# Altium PCB screen_board.PcbDoc
Units mm, origin at the board's own origin, x right, y up, seen from the top; angles counter-clockwise.
Board outline 88.5 x 66.5 mm, 2 copper layers (Top Layer, Bottom Layer), stack 1.535 mm thick; 70 components, 31 nets, 202 pads, 66 vias.
Unrouted connection lines stored in the file: 1.
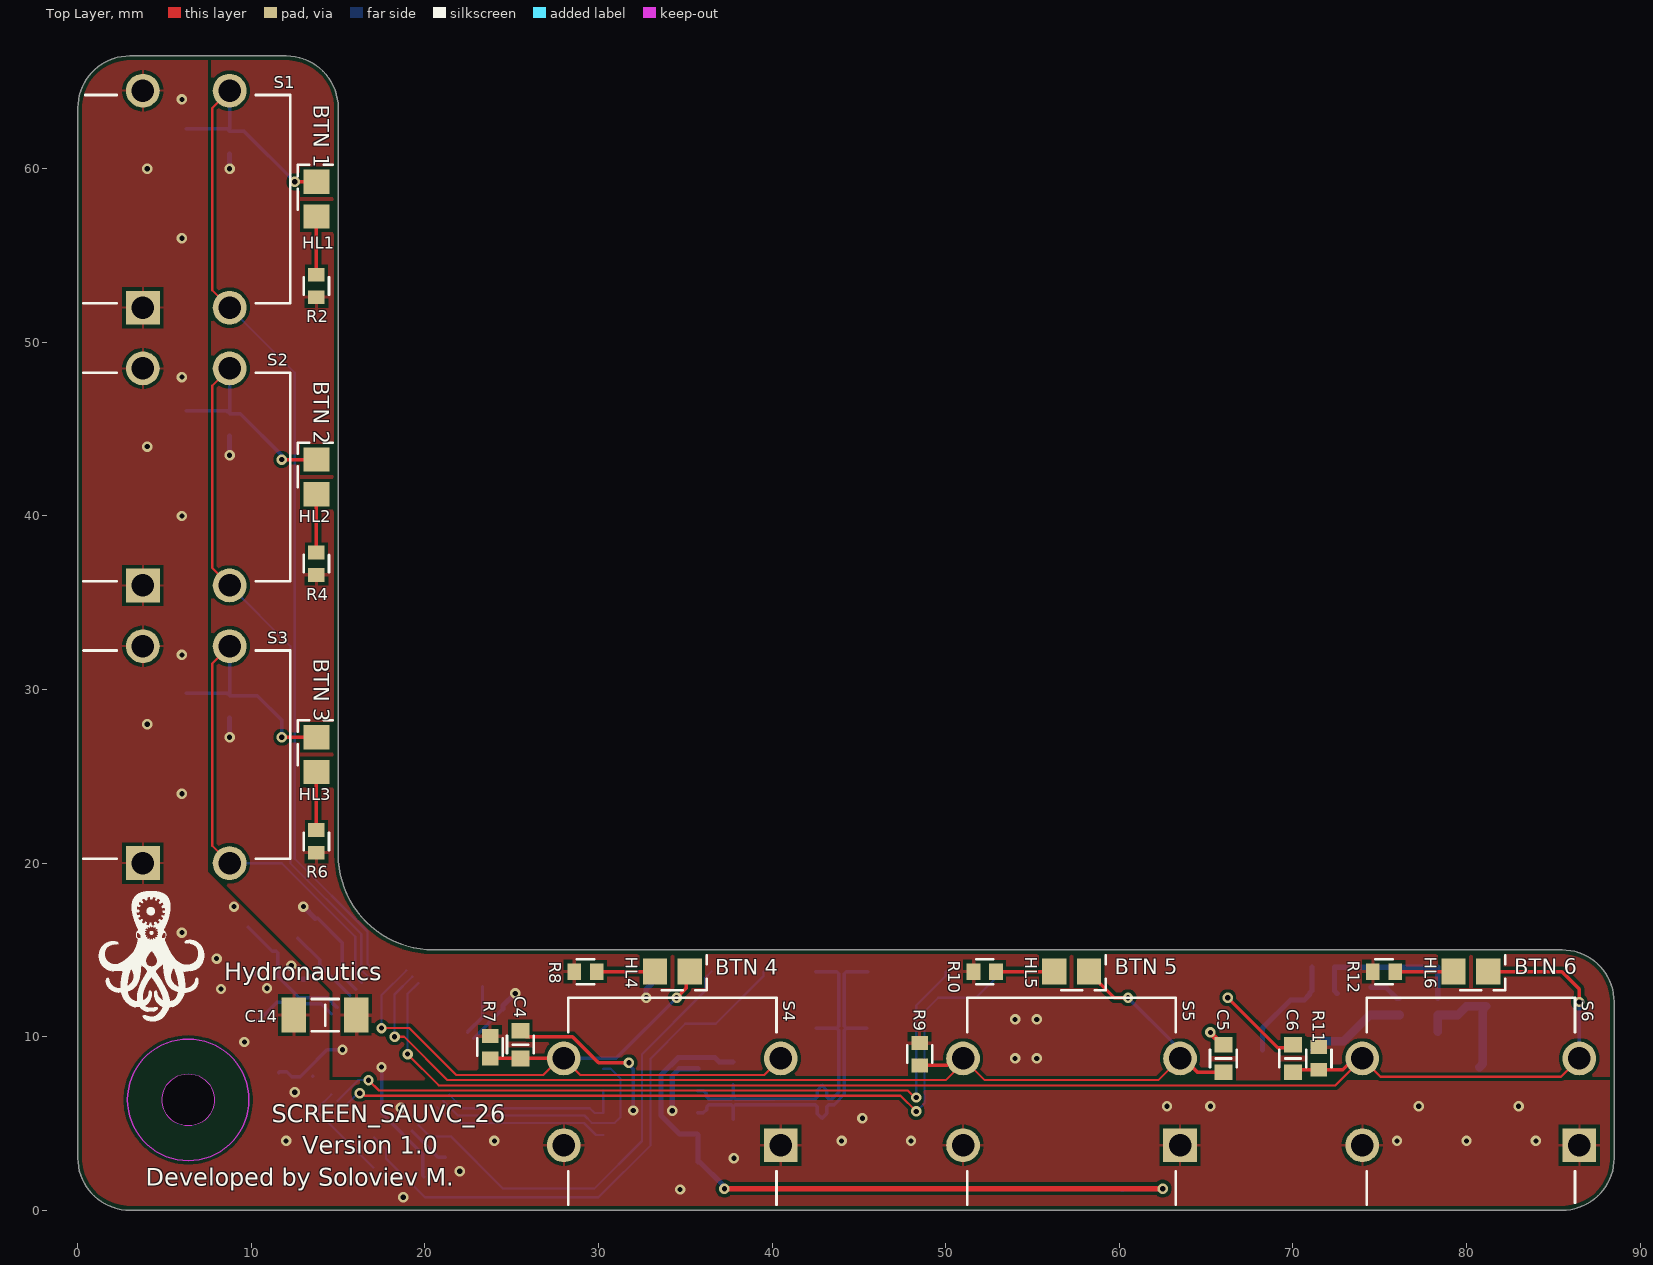
[diagram p0: Top Layer view]
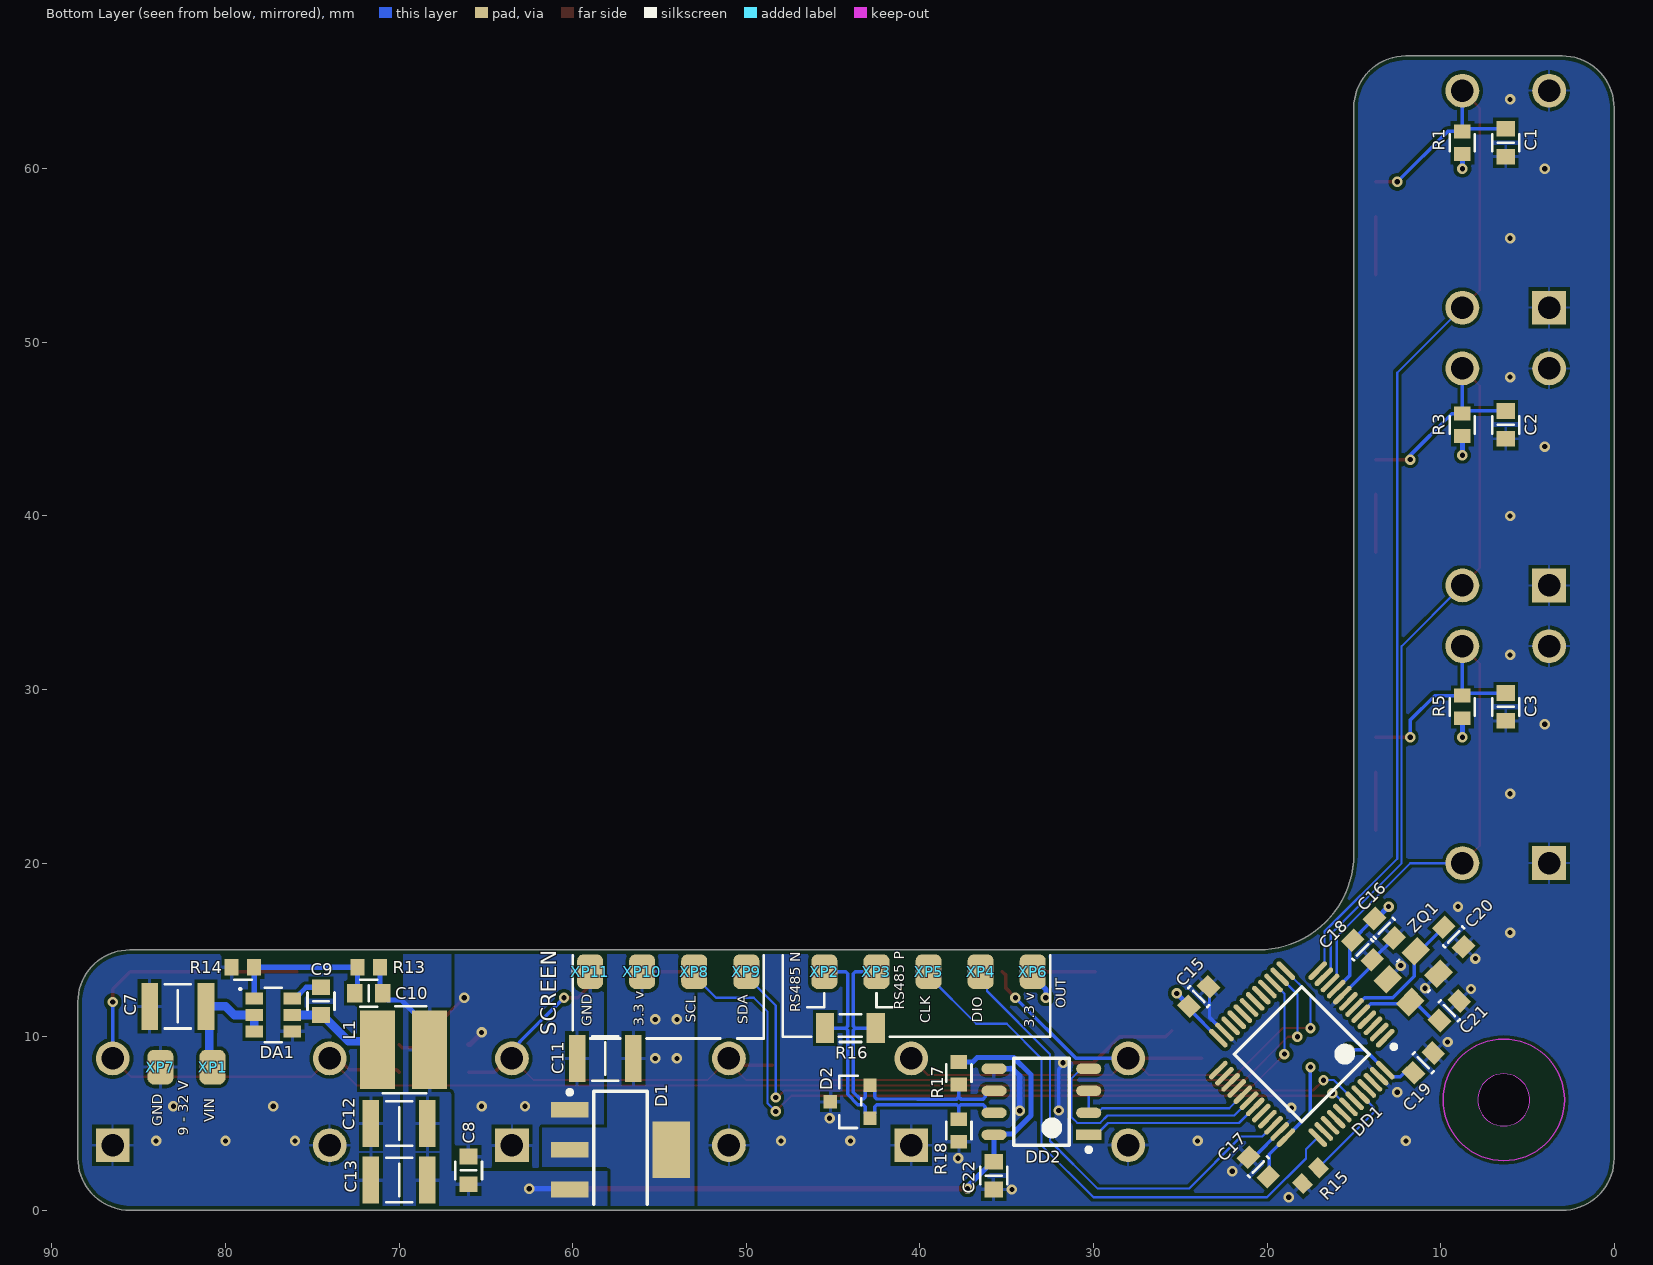
[diagram p1: Bottom Layer view, seen from below]
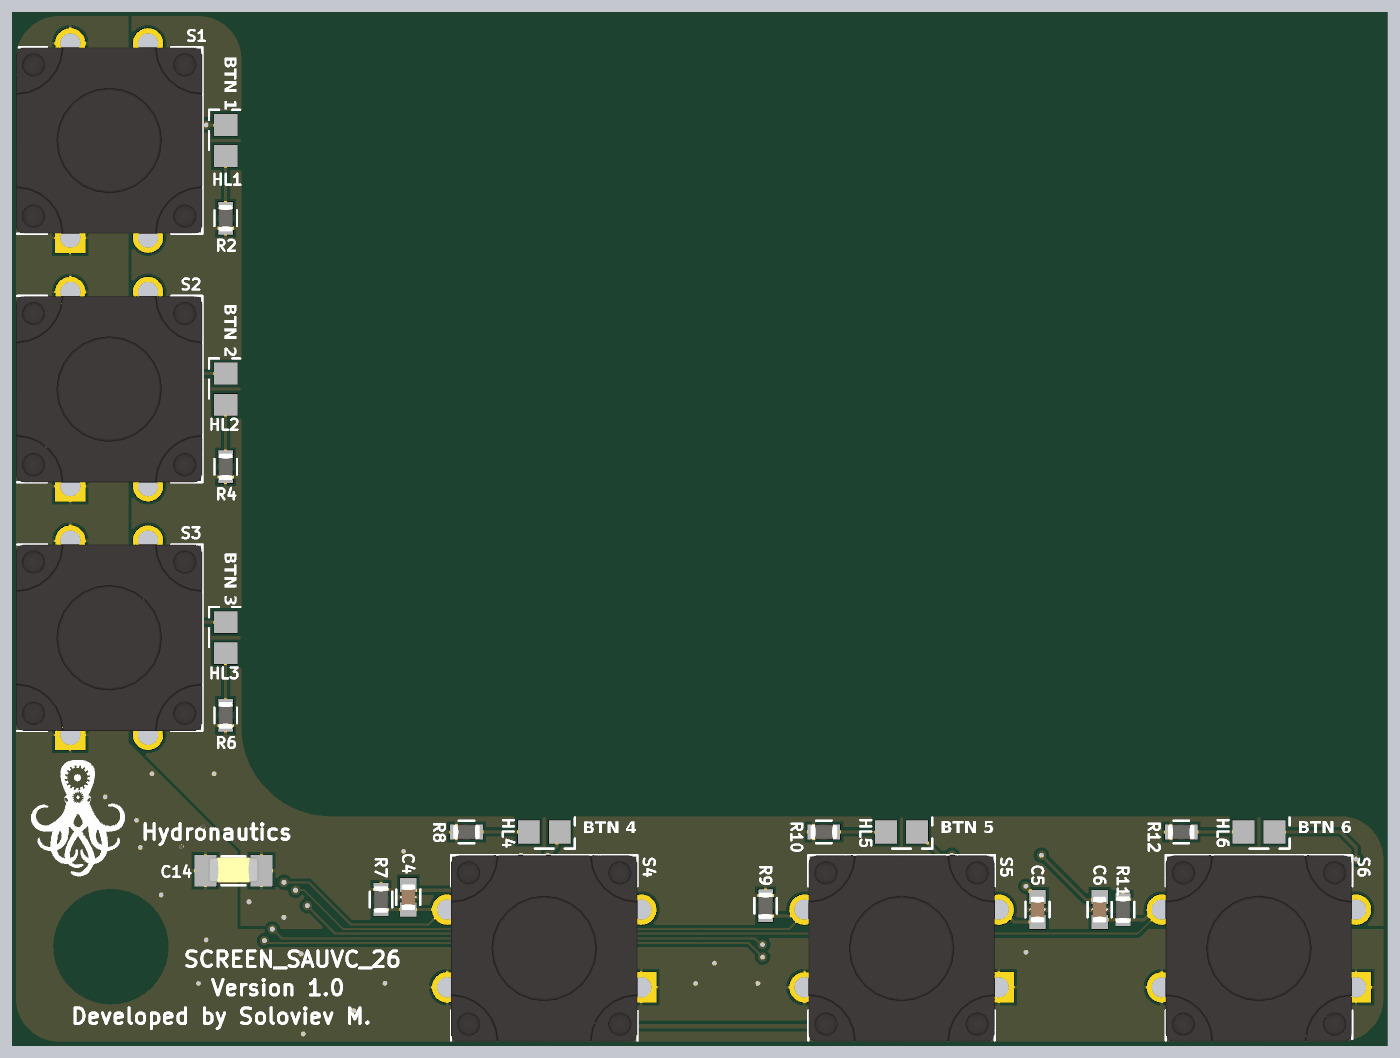
[diagram p2: 3D render of the assembled board from above, using the file's embedded part models]
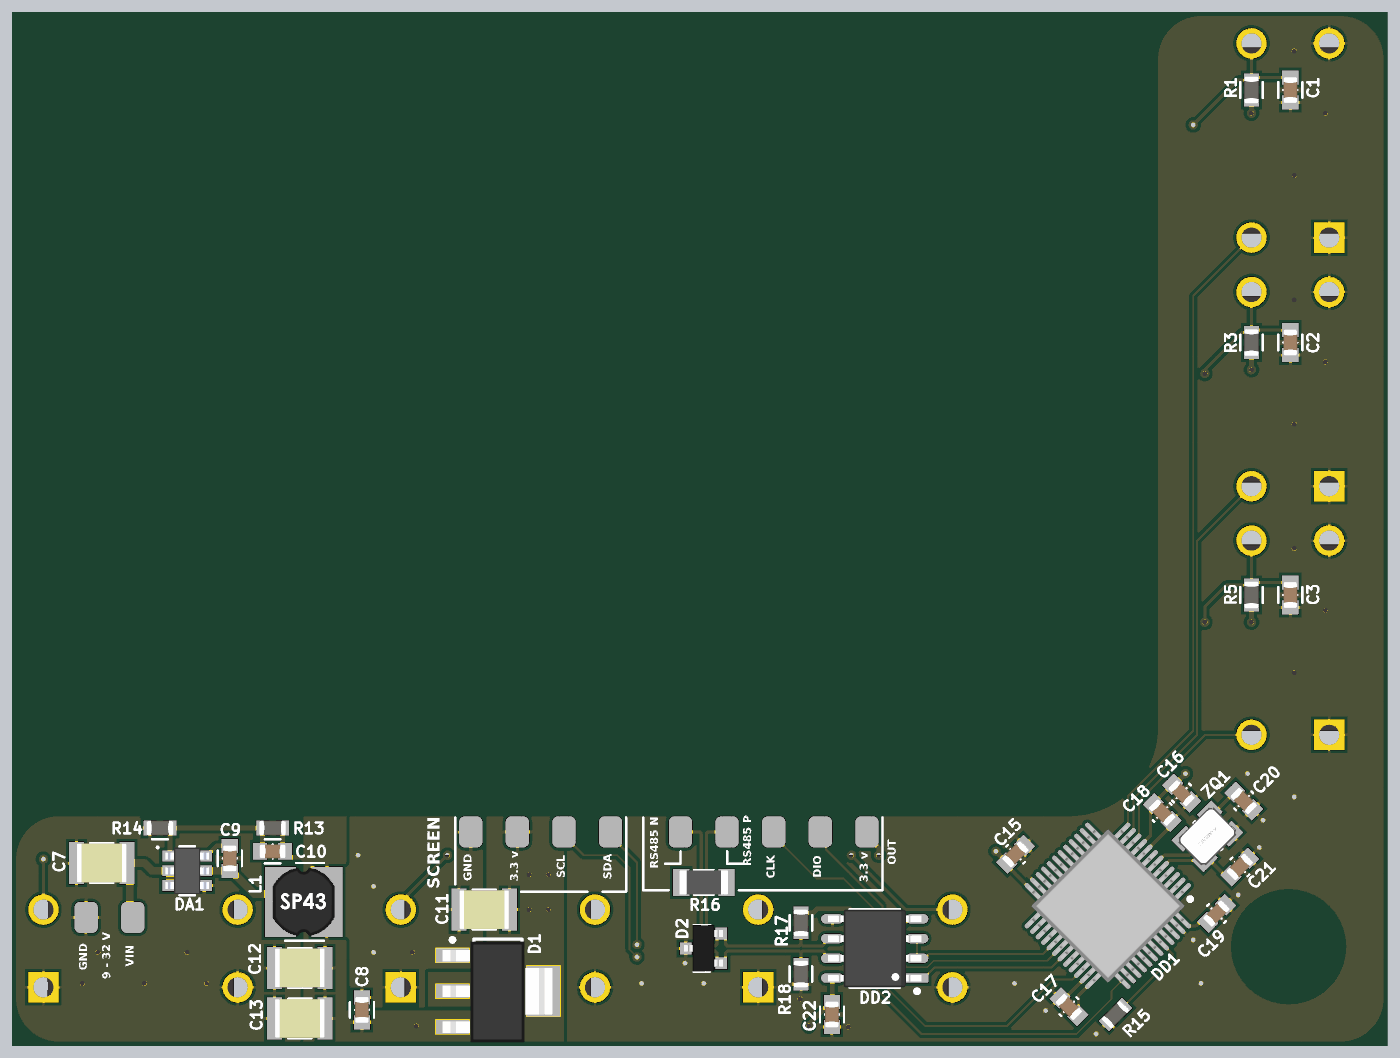
[diagram p3: 3D render of the assembled board from below, using the file's embedded part models]

## Layer stack, top to bottom
Top Solder: solder mask 0.0102, Solder Resist, Dk 3.5
Top Layer: signal copper 0.0175
Dielectric 1: core 1.5, FR4, Dk 4.6
Bottom Layer: signal copper 0.0175
Bottom Solder: solder mask 0.0102, Solder Resist, Dk 3.5

## Board outline
0.006,3.006 0.006,63.506 cw(c3.006,63.506) 3.006,66.506 12.006,66.506 cw(c12.006,63.506) 15.006,63.506 15.006,20.506 ccw(c20.506,20.506) 20.506,15.006 85.506,15.006 cw(c85.506,12.006) 88.506,12.006 88.506,3.006 cw(c85.506,3.006) 85.506,0.006 3.006,0.006 cw(c3.006,3.006)
cut-out: 6.364,4.864 cw(c6.364,6.364) 6.364,7.864 cw(c6.364,6.364)

## Design rules (kind name [scope] priority, off if disabled: settings)
AcuteAngle [All] p1: minimum=3.50000000000000E+0001 checktracksonly=FALSE
BoardOutlineClearance "BoardOutlineClearance 1" [All] p1: gap=0.25 ignorepadtopadclearanceinfootprint=FALSE except(0: Arc-SplitContinuation Track-SplitContinuation SMDPad-SplitContinuation THPad-SplitContinuation Via-SplitContinuation Fill-SplitContinuation Poly-SplitContinuation Region-SplitContinuation Text-SplitContinuation) // Milling
BoardOutlineClearance "BoardOutlineClearance 2" [All] p2: gap=0.4 ignorepadtopadclearanceinfootprint=FALSE except(0: Arc-SplitContinuation Track-SplitContinuation SMDPad-SplitContinuation THPad-SplitContinuation Via-SplitContinuation Fill-SplitContinuation Poly-SplitContinuation Region-SplitContinuation Text-SplitContinuation) // V-Cut
Clearance "Clearance-1 1/2 Oz" [All] p1: gap=0.125 ignorepadtopadclearanceinfootprint=FALSE except(0.2: Arc-Fill Arc-Poly Track-Fill Track-Poly SMDPad-SMDPad SMDPad-Fill SMDPad-Poly THPad-Fill THPad-Poly Via-Fill Via-Poly Fill-Fill Fill-Poly Poly-Poly Poly-Region Poly-Text; 0.25: Arc-Hole Track-Hole SMDPad-Hole THPad-Hole Via-Hole Fill-Hole Poly-Hole Region-Hole Text-Hole) // Standart
DiffPairsRouting "DiffPairsRouting 1/2 Oz" [All] p1: maxlimit=0.125 minlimit=0.125 mostfreqgap=0.125 toplayer_minwidth=0.2 toplayer_maxwidth=0.2 toplayer_prefwidth=0.2 bottomlayer_minwidth=0.2 bottomlayer_maxwidth=0.2 bottomlayer_prefwidth=0.2 maxuncoupledlength=12.7
HoleSize "Minimum HoleSize" [IsPad] p1: absolutevalues=TRUE maxlimit=5.9 minlimit=0.6 maxpercent=80.000 minpercent=20.000
HoleSize "Minimum HoleSize VIA 1" [IsVia] p2: absolutevalues=TRUE maxlimit=5.9 minlimit=0.3 maxpercent=80.000 minpercent=20.000 // Standart
HoleToHoleClearance Hole2HoleClearance [All] p1: gap=0.25 allowstackedmicrovias=FALSE
MinimumAnnularRing "Minimum AR VIA Standart" [IsVia] p1: minimumring=0.15
MinimumAnnularRing "Minimum AR PAD Standart" [IsPAD] p2: minimumring=0.2
MinimumSolderMaskSliver "SolderMask Bridge Standart" [All] p1: minsoldermaskwidth=0.149 // All Masks
PlaneClearance "PlaneClearance-1 1/2 Oz" [All] p1: clearance=0.2 // Standart
PlaneConnect "TermalConnect-1 1/2 Oz" [All] p1: pad.planeconnectstyle=Relief pad.reliefexpansion=0.2 pad.reliefentries=4 pad.reliefconductorwidth=0.2 pad.reliefairgap=0.2 via.planeconnectstyle=Direct via.reliefexpansion=0.2 via.reliefentries=4 via.reliefconductorwidth=0.2 via.reliefairgap=0.2 // Standart
PolygonConnect [HasFootprint('SOT223')] p1: connectstyle=Direct reliefconductorwidth=0.254 reliefentries=4 polygonreliefangle="90 Angle" airgapwidth=0.254
PolygonConnect "PolygonConnect-1 1/2 Oz" [All] p2: thpad.connectstyle=Relief thpad.reliefconductorwidth=0.15 thpad.reliefentries=4 thpad.polygonreliefangle="90 Angle" thpad.airgapwidth=0.2 smdpad.connectstyle=Relief smdpad.reliefconductorwidth=0.2 smdpad.reliefentries=4 smdpad.polygonreliefangle="90 Angle" smdpad.airgapwidth=0.2 via.connectstyle=Direct via.reliefconductorwidth=0.254 via.reliefentries=4 via.polygonreliefangle="90 Angle" via.airgapwidth=0.254 // Standart
RoutingCorners [All] p1 off: cornerstyle=45-Degree minsetback=2.54 maxsetback=2.54
RoutingVias [All] p1: holewidth=0.3 width=0.6 viastyle="Through Hole" minholewidth=0.3 minwidth=0.6 maxholewidth=0.3 maxwidth=0.6
SilkToSilkClearance Silk2SilkClearance [All] p1 off: silktosilkclearance=0.15
SilkToSolderMaskClearance Silk2SolderMaskClearance [IsPad] p1 off: minsilkscreentomaskgap=0.15 clearancetoexposedcopper=TRUE
SolderMaskExpansion [IsVia] p1: expansion=0.102 istentingtop=TRUE
SolderMaskExpansion "SolderMaskExpansion LDI" [All] p2: expansion=0.05 istentingtop=FALSE // Advance
UnRoutedNet [All] p1: checkbadconnections=TRUE
Width "Width 1/2 Oz" [All] p1: maxlimit=0.5 minlimit=0.125 preferedwidth=0.2 checkconnectedcopper=TRUE
20 further rules are at their usual default settings.

## Classes and differential pairs
component class RS485: C22 D2 DD2 R16 R17 R18
net class BUTTON[1..6]: BUTTON1 BUTTON2 BUTTON3 BUTTON4 BUTTON5 BUTTON6
component class Power: C7 C8 C9 C10 C11 C12 C13 D1 DA1 L1 R13 R14
component class connectors: XP1 XP2 XP3 XP4 XP5 XP6 XP7 XP8 XP9 XP10 XP11
component class buttons_and_leds: C1 C2 C3 C4 C5 C6 HL1 HL2 HL3 HL4 HL5 HL6 R1 R2 R3 R4 R5 R6 R7 R8 R9 R10 R11 R12 S1 S2 S3 S4 S5 S6
component class MCU: C14 C15 C16 C17 C18 C19 C20 C21 DD1 R15 ZQ1
differential pair RS485: +RS485_P -RS485_N

## Components (designator, comment, footprint, x,y, rotation, side; value= is the part's Value field where it differs from the comment)
C1 "Capacitor" 0603C 6.25,61.5 r90 bottom value="0,1 мк"
C2 "Capacitor" 0603C 6.25,45.25 r90 bottom value="0,1 мк"
C3 "Capacitor" 0603C 6.25,29 r90 bottom value="0,1 мк"
C4 "Capacitor" 0603C 25.5,9.55 r270 top value="0,1 мк"
C5 "Capacitor" 0603C 66,8.75 r270 top value="0,1 мк"
C6 "Capacitor" 0603C 70,8.75 r270 top value="0,1 мк"
C7 "Capacitor" 1210C 82.75,11.75 r180 bottom value="10 мк"
C8 "Capacitor" 0603C 66,2.3 r270 bottom value="0,1 мк"
C9 "Capacitor" 0603C 74.5,12.05 r270 bottom value="0,1 мк"
C10 "Capacitor" 0603C 71.75,12.5 r180 bottom value="100 п"
C11 "Capacitor" 1210C 58.125,8.75 r180 bottom value="10 мк"
C12 "Capacitor" 1210C 70,5 r180 bottom value="22 мк"
C13 "Capacitor" 1210C 70,1.75 r180 bottom value="22 мк"
C14 "Capacitor" 1206C 14.25,11.25 r0 top value="4,7 мк"
C15 "Capacitor" 0603C 23.934,12.316 r315 bottom value="0,1 мк"
C16 "Capacitor" 0603C 13.25,16.25 r45 bottom value="1 мк"
C17 "Capacitor" 0603C 20.5,2.5 r225 bottom value="0,1 мк"
C18 "Capacitor" 0603C 14.5,15 r45 bottom value="10 н"
C19 "Capacitor" 0603C 11,8.5 r315 bottom value="0,1 мк"
C20 "Capacitor" 0603C 9.25,15.75 r45 bottom value="12 п"
C21 "Capacitor" 0603C 9.5,11.5 r315 bottom value="12 п"
C22 "Capacitor" 0603C 35.75,2 r90 bottom value="0,1 мк"
D1 "LD1117S33CTR" SOT223 57.25,3.5 r180 bottom
D2 "PSM712" SOT23-3 44,6.25 r0 bottom
DA1 "AP63200" TSOT26 77.25,11.25 r270 bottom
DD1 "STM32F103C8T6" LQFP48 18,9 r315 bottom
DD2 "MAX485CSA" SOIC-8 33,6.25 r0 bottom
HL1 "LED" 0805D 13.75,58.25 r90 top
HL2 "LED" 0805D 13.75,42.25 r90 top
HL3 "LED" 0805D 13.75,26.25 r90 top
HL4 "LED" 0805D 34.25,13.75 r0 top
HL5 "LED" 0805D 57.25,13.75 r0 top
HL6 "LED" 0805D 80.25,13.75 r0 top
L1 "SP43-150K" SP43 69.75,9.25 r180 bottom value="15 мк"
R1 "Resistor" 0603R 8.75,61.5 r270 bottom value="10 к"
R2 "Resistor" 0603R 13.75,53.25 r270 top value=47
R3 "Resistor" 0603R 8.75,45.25 r270 bottom value="10 к"
R4 "Resistor" 0603R 13.75,37.25 r270 top value=47
R5 "Resistor" 0603R 8.75,29 r270 bottom value="10 к"
R6 "Resistor" 0603R 13.75,21.25 r270 top value=47
R7 "Resistor" 0603R 23.75,9.4 r90 top value="10 к"
R8 "Resistor" 0603R 29.25,13.75 r180 top value=47
R9 "Resistor" 0603R 48.5,9 r90 top value="10 к"
R10 "Resistor" 0603R 52.25,13.75 r180 top value=47
R11 "Resistor" 0603R 71.5,8.75 r90 top value="10 к"
R12 "Resistor" 0603R 75.25,13.75 r180 top value=47
R13 "Resistor" 0603R 71.75,14 r180 bottom value="36 к"
R14 "Resistor" 0603R 79,14 r180 bottom value="6,8 к"
R15 "Resistor" 0603R 17.5,2 r135 bottom value="10 к"
R16 "Resistor" 1206R 44,10.5 r0 bottom value=120
R17 "Resistor" 0603R 37.75,7.9 r90 bottom value=680
R18 "Resistor" 0603R 37.75,4.6 r90 bottom value=680
S1 "Button_DIP_12x12" Button_DIP_12x12 3.75,52 r90 top
S2 "Button_DIP_12x12" Button_DIP_12x12 3.75,36 r90 top
S3 "Button_DIP_12x12" Button_DIP_12x12 3.75,20 r90 top
S4 "Button_DIP_12x12" Button_DIP_12x12 40.5,3.75 r180 top
S5 "Button_DIP_12x12" Button_DIP_12x12 63.5,3.75 r180 top
S6 "Button_DIP_12x12" Button_DIP_12x12 86.5,3.75 r180 top
XP1 "signal_PAD" SS_PAD#1 80.75,8.25 r0 bottom
XP2 "signal_PAD" SS_PAD#2 45.5,13.75 r90 bottom
XP3 "signal_PAD" SS_PAD#2 42.5,13.75 r90 bottom
XP4 "signal_PAD" SS_PAD#2 36.5,13.75 r270 bottom
XP5 "signal_PAD" SS_PAD#2 39.5,13.75 r270 bottom
XP6 "signal_PAD" SS_PAD#2 33.5,13.75 r270 bottom
XP7 "signal_PAD" SS_PAD#1 83.75,8.25 r0 bottom
XP8 "signal_PAD" SS_PAD#2 53,13.75 r90 bottom
XP9 "signal_PAD" SS_PAD#2 50,13.75 r90 bottom
XP10 "signal_PAD" SS_PAD#2 56,13.75 r90 bottom
XP11 "signal_PAD" SS_PAD#2 59,13.75 r270 bottom
ZQ1 "XTAL_GND" QSMD3.2x2.5 11.432,14.934 r225 bottom value="8 МГц"

## Footprints (in the part's own frame and the unit in brackets; to place one, negate y for a bottom-side part, rotate by r counter-clockwise, add the part's x,y. Pads: shape width x height; smd on the part's side, far side on the other; paste and mask are expansions set on the pad)
0603C [mm] "Chip Resistor, 2-Leads, Body 1,40x0,80mm, IPC Medium Density"
  rect 0.9x1.05 smd: 1(-0.8,0) 2(0.8,0)
  silkscreen extent -0.5,-0.77 0.5,0.77, body extent -0.85,-0.45 0.85,0.45, height 0.9
0603R [mm] "Chip Resistor, 2-Leads, Body 1.60x0.85mm, IPC Medium Density"
  rect 0.8x0.95 smd: 1(-0.65,0) 2(0.65,0)
  silkscreen extent -0.5,-0.72 0.5,0.72, body extent -0.87,-0.47 0.88,0.48, height 0.9
0805D [mm]
  rect 1.4x1.5 smd: 1(-1,0) 2(1,0)
  silkscreen extent -0.6,-0.93 1.97,1.07, body extent -1.07,-0.7 1.07,0.7, height 0.7
1206C [mm]
  rect 1.4x2 smd paste+0: 1(-1.8,0) 2(1.8,0)
  silkscreen extent -0.77,-0.92 0.77,0.92, body extent -1.6,-0.74 1.6,0.86, height 1.59
1206R [mm]
  rect 1.05x1.72 smd: 1(-1.46,0) 2(1.46,0)
  silkscreen extent -0.63,-0.8 0.63,0.8, body extent -1.55,-0.77 1.55,0.77, height 0.65
1210C [mm]
  rect 0.954x2.706 smd paste+0: 1(-1.625,0) 2(1.625,0)
  silkscreen extent -0.75,-1.28 0.75,1.28, body extent -1.6,-1.25 1.6,1.25, height 2.7
Button_DIP_12x12 [mm]
  rect 1.95x1.95 hole 1.3: 1(0,0)
  round 1.95 hole 1.3: 1(12.5,0) 2(0,-5) 2(12.5,-5)
  silkscreen extent 0.25,-8.5 12.25,3.42, body extent 0.25,-8.5 12.25,3.5, height 5.9
LQFP48 [mm] "TSQFP, 48-Leads, Body 7,00x7,00mm, Pitch 0,50mm, IPC Medium Density"
  oval 1.4x0.29 smd mask+0.025: 1(-4.05,2.75) 2(-4.05,2.25) 3(-4.05,1.75) 4(-4.05,1.25) 5(-4.05,0.75) 6(-4.05,0.25) 7(-4.05,-0.25) 8(-4.05,-0.75) 9(-4.05,-1.25) 10(-4.05,-1.75) 11(-4.05,-2.25) 12(-4.05,-2.75) 25(4.05,-2.75) 26(4.05,-2.25) 27(4.05,-1.75) 28(4.05,-1.25) 29(4.05,-0.75) 30(4.05,-0.25) 31(4.05,0.25) 32(4.05,0.75) 33(4.05,1.25) 34(4.05,1.75) 35(4.05,2.25) 36(4.05,2.75)
  oval 0.29x1.4 smd mask+0.025: 13(-2.75,-4.05) 14(-2.25,-4.05) 15(-1.75,-4.05) 16(-1.25,-4.05) 17(-0.75,-4.05) 18(-0.25,-4.05) 19(0.25,-4.05) 20(0.75,-4.05) 21(1.25,-4.05) 22(1.75,-4.05) 23(2.25,-4.05) 24(2.75,-4.05) 37(2.75,4.05) 38(2.25,4.05) 39(1.75,4.05) 40(1.25,4.05) 41(0.75,4.05) 42(0.25,4.05) 43(-0.25,4.05) 44(-0.75,4.05) 45(-1.25,4.05) 46(-1.75,4.05) 47(-2.25,4.05) 48(-2.75,4.05)
  silkscreen extent -4.17,-2.75 2.75,3.57, body extent -4.5,-4.47 4.5,4.52, height 1.48
QSMD3.2x2.5 [mm] "Кварцевый резонатор"
  rect 1.05x1.3 smd: 1(0,0) 2(1.85,-2.3) 3(0,-2.3) 3(1.85,0)
  silkscreen extent -0.32,-1.18 2.18,-1.02, body extent -0.33,-2.75 2.18,0.45, height 0.8
SOIC-8 [mm] "for operational amplifier"
  rect 1.45x0.6 smd: 1(-2.725,1.905)
  oval 1.45x0.6 smd: 2(-2.725,0.635) 3(-2.725,-0.635) 4(-2.725,-1.905) 5(2.725,-1.905) 6(2.725,-0.635) 7(2.725,0.635) 8(2.725,1.905)
  silkscreen extent -2.85,-2.5 1.6,2.88, body extent -3,-2.5 3,2.5, height 1.75
SOT23-3 [mil]
  rect 30x30 smd: 1(-44.29,37.4) 2(-44.29,-37.6) 3(45.71,-0.1)
  silkscreen extent -25,-59 26,59, body extent -48,-60 50,59, height 41
SOT223 [mm] "SOT223, ld1117"
  rect 2.15x0.9 smd: 1(-2.925,2.3) 2(-2.925,0) 3(-2.925,-2.3)
  rect 2.15x3.25 smd: 2(2.925,0)
  silkscreen extent -3.05,-3.14 1.55,3.42, body extent -3.56,-3.3 3.51,3.2, height 1.6
SP43 [mm]
  rect 2x4.5 smd: 1(-1.5,0) 2(1.5,0)
  silkscreen extent -1.2,-2.5 1.3,2.5, body extent -2,-2.22 2,2.22, height 3.19
SS_PAD#1 [mm]
  rrect50% 1.5x2 smd: 1(0,0)
SS_PAD#2 [mm]
  rrect50% 2x1.5 smd: 1(0,0)
TSOT26 [mm]
  rect 0.7x1 smd: 1(-0.95,-1.1) 2(0,-1.1) 3(0.95,-1.1) 4(0.95,1.1) 5(0,1.1) 6(-0.95,1.1)
  silkscreen extent -1.58,-1.95 1.57,0.5, body extent -1.5,-1.4 1.5,1.4, height 1.01

## Part data
C1 C2 C3 C4 C5 C6 C8 C9 C15 C17 C19 C22: library part Capacitor_0,1u_10_50V_X7R_0603C, "Конденсатор 0603C ёмкостью 0,1 мк 10%, 50 В, X7R", Capacity (nF)=100, Dielectric=X7R, Tolerance=10%, Voltage (V)=50, Part Number=Capacitor_0,1u_10_50V_X7R_0603C
  C1 C2 C3 C4 C5 C6 C9 C15 C17 C19: Library Path2=Schematic\Capacitor.SchLib
C7 C11: library part Capacitor_10u_10_35V_X7R_1210C, "Конденсатор 1210C ёмкостью 10 мк 10%, 35 В, X7R", Capacity (nF)=10000, Dielectric=X7R, Tolerance=10%, Voltage (V)=35, Part Number=Capacitor_10u_10_35V_X7R_1210C
  C7: Library Path2=Schematic\Capacitor.SchLib
C10: library part Capacitor_100p_10_50V_X7R_0603C, "Конденсатор 0603C ёмкостью 100 п 10%, 50 В, X7R", Capacity (nF)=0,1, Dielectric=X7R, Tolerance=10%, Voltage (V)=50, Library Path2=Schematic\Capacitor.SchLib, Part Number=Capacitor_100p_10_50V_X7R_0603C
C12 C13: library part Capacitor_22u_10_25V_X7R_1210C, "Конденсатор 1210C ёмкостью 22 мк 10%, 25 В, X7R", Capacity (nF)=22000, Dielectric=X7R, Tolerance=10%, Voltage (V)=25, Library Path2=Schematic\Capacitor.SchLib, Part Number=Capacitor_22u_10_25V_X7R_1210C
C14: library part Capacitor_4,7u_10_50V_X7R_1206C, "Конденсатор 1206C ёмкостью 4,7 мк 10%, 50 В, X7R", Capacity (nF)=4700, Dielectric=X7R, Tolerance=10%, Voltage (V)=50, Library Path2=Schematic\Capacitor.SchLib, Part Number=Capacitor_4,7u_10_50V_X7R_1206C
C16: library part Capacitor_1u_10_50V_X7R_0603C, "Конденсатор 0603C ёмкостью 1 мк 10%, 50 В, X7R", Capacity (nF)=1000, Dielectric=X7R, Tolerance=10%, Voltage (V)=50, Library Path2=Schematic\Capacitor.SchLib, Part Number=Capacitor_1u_10_50V_X7R_0603C
C18: library part Capacitor_10n_10_50V_X7R_0603C, "Конденсатор 0603C ёмкостью 10 н 10%, 50 В, X7R", Capacity (nF)=10, Dielectric=X7R, Tolerance=10%, Voltage (V)=50, Library Path2=Schematic\Capacitor.SchLib, Part Number=Capacitor_10n_10_50V_X7R_0603C
C20 C21: library part "0,1 мк", "Конденсатор 12п", Part Number=Capacitor
D1: "Линейный стабилизатор напряжения", Part Number=LD1117S33CTR
D2: "Защитный диод для линии RS-485", Interface=RS-485, Part Number=PSM712
DA1: "DC-DC понижающий преобразователь, Vin: 3.8 - 40 В, adj, 2 А", Part Number=AP63200
DD1: "Микроконтроллер", Case=корпус, Manufacturer="ST Microelectronics", Value1=MCU, Datasheet=http://www.st.com/content/ccc/resource/technical/document/datasheet/33/d4/6f/1d/df/0b/4c/6d/CD00161566.pdf/files/CD00161566.pdf/jcr:content/translations/en.CD00161566.pdf, Notice="48 пиновая версия STM32F103", Part Number=STM32F103C8T6, Rate=-0,3...4,0В, Shop="магазин с самой дешевой ценой"
DD2: "RS-485 приёмопередатчик", Part Number=MAX485CSA
HL1 HL2 HL3 HL4 HL5 HL6: "Светодиод", Color=Зел., Part Number=LED
L1: "Индуктивность на 15 мкГн, номинальный ток 1,3 А", Current (A)=1,3, Inductance (μH)=15, Part Number=SP43-150K
R1 R3 R5 R7 R9 R11 R15: library part Resistor_10k_1_0603, "Резистор номиналом 10 кОм 1%", Tolerance=1%, Part Number=Resistor_10k_1_0603
R2 R4 R6 R8 R10 R12: library part Resistor_47_1_0603, "Резистор номиналом 47 Ом 1%", Tolerance=1%, Part Number=Resistor_47_1_0603
R13: library part Resistor_36k_1_0603, "Резистор номиналом 36 кОм 1%", Tolerance=1%, Part Number=Resistor_36k_1_0603
R14: library part Resistor_6.8k_1_0603, "Резистор номиналом 6,8 кОм 1%", Tolerance=1%, Part Number=Resistor_6.8k_1_0603
R16: library part Resistor_120_1_0603, "Резистор номиналом 120 Ом 1%", Tolerance=1%, Part Number=Resistor_120_1_0603
R17 R18: library part Resistor_680_1_0603, "Резистор номиналом 680 Ом 1%", Tolerance=1%, Part Number=Resistor_680_1_0603
S1 S2 S3 S4 S5 S6: "Тактовая кнопка, DIP 12 x 12 мм", Part Number=Button_DIP_12x12
XP1: "контактная площадка под пайку тонких проводов", Value1=VIN, Part Number=signal_PAD, System=Connector
XP2: "контактная площадка под пайку тонких проводов", Value1=RS485_B, Part Number=signal_PAD, System=Connector
XP3: "контактная площадка под пайку тонких проводов", Value1=RS485_A, Part Number=signal_PAD, System=Connector
XP4: "контактная площадка под пайку тонких проводов", Value1=SWDIO, Part Number=signal_PAD, System=Connector
XP5: "контактная площадка под пайку тонких проводов", Value1=SWCLOK, Part Number=signal_PAD, System=Connector
XP6 XP10: "контактная площадка под пайку тонких проводов", Value1="+3,3 В", Part Number=signal_PAD, System=Connector
XP7 XP11: "контактная площадка под пайку тонких проводов", Value1=GND, Part Number=signal_PAD, System=Connector
XP8: "контактная площадка под пайку тонких проводов", Value1=I2C_SCL, Part Number=signal_PAD, System=Connector
XP9: "контактная площадка под пайку тонких проводов", Value1=I2C_SDA, Part Number=signal_PAD, System=Connector
ZQ1: "Кварцевый резонатор с входом земли", Part Number=XTAL_GND

## Via types
v1: diameter 0.6, hole 0.3, Top Layer to Bottom Layer, tented both sides, 66 vias

## Nets (pads, with @x,y where several pads share a name; then routed paths per layer and width w, separated by ;. In a path a pad name is that pad's centre, name@x,y a point inside that pad or via, vN(x,y) a via of type N, cw(c..) or ccw(c..) an arc to the next point about the centre after c; other vN are vias at no path point)
"+3,3 В": C11.2 C14.2 C15.2 C16.2 C17.2 C18.2 C19.2 D1.2 DD1.9 DD1.24 DD1.36 DD1.48 R1.2 R2.2 R3.2 R4.2 R5.2 R6.2 R7.2 R8.2 R9.2 R10.2 R11.2 R12.2 XP6.1 XP10.1 | length 26.3
  Bottom Layer w0.2: C19.2 11.619,7.987 12.043,7.987 12.335,7.695 12.806,7.695 DD1.48 14.361,9.25 v1(15.25,9.25) ; C16.2@13.684,16.816 C16.2 15.25,15.381 15.25,13.518 DD1.9 ; v1(17.5,8.25) 17.5,5.611 19.881,3.23 19.881,1.987 C17.2 ; DD1.24 C15.2@24.5,11.611
  Bottom Layer w0.3: v1(8.75,27.25) R5.2 ; v1(8.75,43.5) R3.2 ; v1(8.75,60) R1.2 ; v1(13,17.5) C16.2@13.684,16.816 ; C15.2@24.5,11.611 C15.2 24.5,11.8 v1(25.2,12.5) ; v1(32.75,12.25) 32.736,12.264 32.736,12.724 33.5,13.488 XP6.1
  other v1: 54,8.75 55.25,8.75 54,11 55.25,11
"+5 В": C8.2 C10.2 C12.2 C13.2 C22.2 D1.3 DD2.8 L1.2 R13.2 R17.2 | length 47.3
  Top Layer w0.3: v1(37.25,1.25) v1(62.5,1.25)
  Bottom Layer w0.3: v1(37.25,1.25) 37.193,1.307 37.193,1.432 35.825,2.8 C22.2 35.725,2.825 DD2.8 35.668,4.402 34.666,4.402 33.6,5.468 33.6,7.807 34.598,8.805 36.695,8.805 36.95,8.55 R17.2 ; D1.3 60.225,1.25 v1(62.5,1.25) ; L1.2 68.25,10.5 69.875,12.125 70.65,12.125 70.95,12.425 C10.2 71.1,12.65 R13.2
BOOT0: DD1.44 R15.2 | length 5.8
  Bottom Layer w0.125: DD1.44 13.844,5.905 13.844,5.656 R15.2
BST: C9.1 DA1.6 | length 1.9
  Bottom Layer w0.3: C9.1 75.35,12.85 76,12.2 DA1.6@76.139,12.2
BUTTON1: C1.2 DD1.12 HL1.2 R1.1 S1.2 | length 66.1
  Top Layer w0.125: S1.2@8.75,52 7.75,53 7.75,63.5 S1.2@8.75,64.5
  Top Layer w0.2: v1(12.5,59.25) HL1.2
  Bottom Layer w0.125: S1.2@8.75,52 12.5,48.25 12.5,20.25 16.688,16.062 16.688,14.201 DD1.12
  Bottom Layer w0.2: C1.2 8.6,62.3 R1.1 ; S1.2@8.75,64.5 R1.1 ; v1(12.5,59.25) 9.6,62.15 R1.1
BUTTON2: C2.2 DD1.11 HL2.2 R3.1 S2.2 | length 50.6
  Top Layer w0.125: S2.2@8.75,36 7.75,37 7.75,47.5 S2.2@8.75,48.5
  Top Layer w0.2: v1(11.75,43.25) HL2.2
  Bottom Layer w0.125: S2.2@8.75,36 12.25,32.5 12.25,20 16.335,15.915 16.335,13.847 DD1.11
  Bottom Layer w0.2: C2.2 8.6,46.05 R3.1 ; S2.2@8.75,48.5 R3.1 ; v1(11.75,43.25) 11.823,43.323 11.823,43.427 9.35,45.9 R3.1
BUTTON3: C3.2 DD1.10 HL3.2 R5.1 S3.2 | length 37.1
  Top Layer w0.125: S3.2@8.75,20 7.75,21 7.75,31.5 S3.2@8.75,32.5
  Top Layer w0.2: v1(11.75,27.25) HL3.2
  Bottom Layer w0.125: S3.2@8.75,20 11.75,20 15.981,15.769 15.981,13.494 DD1.10
  Bottom Layer w0.2: C3.2 8.6,29.8 R5.1 ; S3.2@8.75,32.5 R5.1 ; v1(11.75,27.25) 11.75,28.25 10.35,29.65 R5.1
BUTTON4: C4.2 DD1.13 HL4.2 R7.1 S4.2 | length 42.8
  Top Layer w0.125: v1(17.5,10.5) 19.1,10.5 21.8,7.8 26.81,7.8 S4.2@27.61,8.6 ; S4.2@28,8.75 28.95,7.8 39.55,7.8 S4.2@40.5,8.75
  Top Layer w0.2: R7.1 C4.2 S4.2@28,8.75 ; v1(34.5,12.25) 35.067,12.817 35.067,13.567 HL4.2
  Bottom Layer w0.125: v1(17.5,10.5) 17.5,12.389 DD1.13
  Bottom Layer w0.2: S4.2@28,8.75 31,8.75 v1(34.5,12.25)
BUTTON5: C5.2 DD1.14 HL5.2 R9.1 S5.2 | length 65
  Top Layer w0.125: v1(18.25,10) 18.8,10 21.3,7.5 50,7.5 51,8.5 51,8.75 52.25,7.5 62.25,7.5 S5.2@63.5,8.75
  Top Layer w0.2: R9.1 50.126,8.35 50.526,8.75 S5.2@51,8.75 ; HL5.2 58.25,13.7 59.7,12.25 v1(60.5,12.25) ; S5.2@63.5,8.75 63.703,8.75 64.503,7.95 C5.2
  Bottom Layer w0.125: v1(18.25,10) 18.25,12.432 DD1.14
  Bottom Layer w0.2: v1(60.5,12.25) 63.048,9.702 63.048,9.675 63.5,9.224 S5.2@63.5,8.75
BUTTON6: C6.2 DD1.15 HL6.2 R11.1 S6.2 | length 88.1
  Top Layer w0.125: v1(19,9) 20.8,7.2 72.45,7.2 S6.2@73.75,8.5 ; S6.2@74,8.75 75.05,7.7 85.45,7.7 S6.2@86.5,8.75
  Top Layer w0.2: C6.2 70.15,8.1 R11.1 72.876,8.1 73.526,8.75 74,8.75 S6.2@73.75,8.5 ; HL6.2 85.5,13.75 86.5,12.75 v1(86.5,12)
  Bottom Layer w0.125: v1(19,9) 19,12.475 DD1.15
  Bottom Layer w0.2: S6.2@86.5,8.75 v1(86.5,12)
FB: C10.1 DA1.1 R13.1 R14.2 | length 9.3
  Bottom Layer w0.3: C10.1 72.4,12.65 R13.1 R14.2 DA1.1
GND: C1.1 C2.1 C3.1 C4.1 C5.1 C6.1 C7.1 C8.1 C11.1 C12.1 C13.1 C14.1 C15.1 C16.1 C17.1 C18.1 C19.1 C20.1 C21.1 C22.1 D1.1 D2.3 DA1.4 DD1.8 DD1.23 DD1.35 DD1.47 DD2.5 R14.1 R15.1 R18.1 S1.1 S2.1 S3.1 S4.1 S5.1 S6.1 XP7.1 XP11.1 ZQ1.3 | length 30.1
  Top Layer w0.2: C4.1 25.85,10 28.5,10 30,8.5 v1(31.75,8.5) ; v1(66.25,12.25) 69.125,9.375 69.825,9.375 C6.1
  Top Layer w0.3: v1(65.25,10.25) 65.25,10.225 65.925,9.55 C5.1
  Bottom Layer w0.2: C16.1 C18.1 13.934,14.126 DD1.8 ; v1(18.6,5.9) v1@18.677,5.977 ; DD1.35 20.752,3.066 C17.1@21.184,3.066 ; DD1.23 23.316,11.134 C15.1@23.316,12.881 ; v1(31.75,8.5) 31.75,8.392 32,8.142 v1(32,5.75)
  Bottom Layer w0.3: ZQ1.3@10.124,13.626 ZQ1.3@10.374,13.626 ; ZQ1.3@12.942,13.308 ZQ1.3@13.058,13.308 ; v1(34.25,5.738) 34.25,7.75 34.655,8.155 DD2.5
  other v1: 18.75,0.75 34.7,1.2 22,2.25 37.8,3 12,4 24,4 44,4 48,4 76,4 80,4 84,4 45.2,5.3 62.75,6 65.25,6 77.25,6 83,6 12.5,6.8 9.6,9.7 8.25,12.75 10.9,12.8 12.3,14.1 8,14.5 6,16 9,17.5 6,24 4,28 6,32 6,40 4,44 6,48 6,56 4,60 6,64
I2C_SCL: DD1.42 XP8.1 | length 45
  Top Layer w0.125: v1(16.25,6.75) 16.379,6.75 16.529,6.6 47.4,6.6 v1(48.3,5.7)
  Bottom Layer w0.125: DD1.42 15.358,5.959 16.148,6.75 v1(16.25,6.75) ; v1(48.3,5.7) 48.788,6.188 48.788,11.462 49.575,12.25 51.75,12.25 53,13.5 XP8.1
I2C_SDA: DD1.43 XP9.1 | length 42.2
  Top Layer w0.125: v1(16.75,7.5) 17.35,6.9 47.811,6.9 48.211,6.5 v1(48.3,6.5)
  Bottom Layer w0.125: DD1.43 16.146,7.5 v1(16.75,7.5) ; v1(48.3,6.5) 48.3,11.8 50,13.5 XP9.1
NetHL1_1: HL1.1 R2.1 | length 3.4
  Top Layer w0.2: R2.1 HL1.1
NetHL2_1: HL2.1 R4.1 | length 3.4
  Top Layer w0.2: R4.1 HL2.1
NetHL3_1: HL3.1 R6.1 | length 3.4
  Top Layer w0.2: R6.1 HL3.1
NetHL4_1: HL4.1 R8.1 | length 3.4
  Top Layer w0.2: R8.1 HL4.1
NetHL5_1: HL5.1 R10.1 | length 3.3
  Top Layer w0.2: R10.1 HL5.1
NetHL6_1: HL6.1 R12.1 | length 3.4
  Top Layer w0.2: R12.1 HL6.1
OSCin: C21.2 DD1.5 ZQ1.2 | length 5.3
  Bottom Layer w0.2: C21.2 10.434,10.934 11.5,12 ZQ1.2 11.838,11.912 14.028,11.912 DD1.5
OSCout: C20.2 DD1.6 ZQ1.1 | length 7.9
  Bottom Layer w0.2: C20.2 11.197,14.934 ZQ1.1 11.52,14.846 11.52,13.48 12.75,12.25 14.372,12.25 14.935,11.687 DD1.6
RS485_N: D2.1 DD2.7 R16.2 R18.2 XP2.1 | length 20.5
  Bottom Layer w0.2: DD2.7 36.042,5.615 36.227,5.8 36.227,5.954 36.36,6.088 37.633,6.088 37.75,5.97 ; R18.2 37.75,5.97 ; R16.2 44.28,10.5 ; XP2.1 44.28,13.75 44.162,13.633 44.162,10.617 44.28,10.5 ; 37.75,5.97 37.867,6.088 40.283,6.088 40.286,6.09 42.483,6.09 42.6,5.973 42.6,5.575 D2.1 43.156,5.581 43.156,5.973 43.273,6.09 43.573,6.09 44.162,6.679 44.162,10.383 44.28,10.5
RS485_P: D2.2 DD2.6 R16.1 R17.1 XP3.1 | length 20
  Bottom Layer w0.2: DD2.6 36.042,6.885 36.227,6.7 36.227,6.546 36.36,6.413 37.633,6.413 37.75,6.53 ; R17.1 37.75,6.53 ; XP3.1 43.72,13.75 43.837,13.633 43.837,10.617 43.72,10.5 ; R16.1 43.72,10.5 ; 37.75,6.53 37.867,6.413 40.149,6.413 40.151,6.415 42.483,6.415 42.6,6.532 42.6,6.93 D2.2 43.156,6.924 43.156,6.532 43.273,6.415 43.439,6.415 43.837,6.814 43.837,10.383 43.72,10.5
SW: C9.2 DA1.5 L1.1 | length 5.7
  Bottom Layer w0.5: L1.1 71.75,9.75 72.925,9.75 74.425,11.25 C9.2 DA1.5
SWCLOCK: DD1.37 XP5.1 | length 32.6
  Bottom Layer w0.125: DD1.37 17.761,3.511 17.761,2.989 20,0.75 30,0.75 33,3.75 33,8.75 35,10.75 36.75,10.75 39.5,13.5 XP5.1
SWDIO: DD1.34 XP4.1 | length 26.9
  Bottom Layer w0.125: DD1.34 20.275,4.25 21.5,4.25 24.5,1.25 29.75,1.25 32.5,4 32.5,9 36.136,12.636 36.136,13.386 XP4.1
UART_DIR: DD1.29 DD2.2 DD2.3 | length 10.6
  Bottom Layer w0.125: DD1.29 21.401,6.667 22.183,5.885 29.499,5.885 29.769,5.615 DD2.2 DD2.3
UART_RX: DD1.31 DD2.1 | length 10.3
  Bottom Layer w0.125: DD1.31 21.612,5.035 29.16,5.035 29.85,4.345 DD2.1
UART_TX: DD1.30 DD2.4 | length 14.3
  Bottom Layer w0.125: DD1.30 21.894,5.46 29.195,5.46 29.615,5.04 30.938,5.04 31.275,5.377 31.275,7.58 30.7,8.155 DD2.4
VIN: C7.2 DA1.2 DA1.3 XP1.1 | length 7.6
  Bottom Layer w0.5: DA1.3 DA1.2 79.5,11.25 80,11.75 C7.2 80.937,11.562 80.937,8.437 XP1.1
pads on no net: DD1.1 DD1.2 DD1.3 DD1.4 DD1.7 DD1.16 DD1.17 DD1.18 DD1.19 DD1.20 DD1.21 DD1.22 DD1.25 DD1.26 DD1.27 DD1.28 DD1.32 DD1.33 DD1.38 DD1.39 DD1.40 DD1.41 DD1.45 DD1.46

## Polygon pours and split planes (outlines as drawn)
GND on Bottom Layer "GND_L02_P011" (solid, remove dead copper, pour order 11): 0,0 88.5,0 88.5,66.506 0,66.506
GND on Bottom Layer "GND_L02_P006" (solid, pour order 6): 58.25,15.006 58.25,4.75 61.75,4.75 61.75,2.5 66.75,2.5 66.75,15.006
"+3,3 В" on Bottom Layer "+3,3_В_L02_P005" (solid, pour order 5): 58,0.006 58,2.5 61.75,2.5 61.75,4.75 58,4.75 58,15.006 53,15.006 53,9.5 53,0.006
"+5 В" on Bottom Layer "+5_В_L02_P004" (solid, pour order 4): 67,14.75 69.75,14.75 69.75,0 58,0 58,2.25 67,2.25
"+3,3 В" on Top Layer "+3,3_В_L01_P009" (solid, pour order 9): 15,25 25,15 90,15 90,7.5 7.5,7.5 7.5,67.5 15,67.5
GND on Top Layer "GND_L01_P007" (solid, pour order 7): 14.125,12.875 14.5,12.5 14.5,7.5 90,7.5 90,0 0,0 0,70 7.5,70 7.5,19.5

## Keep-outs
Keep-Out Layer:
  circle w0.013: c6.364,6.364 r3.5
  region: 6.364,2.864 cw(c6.364,6.364) 2.864,6.364 cw(c6.364,6.364) 6.364,9.864 cw(c6.364,6.364) 9.864,6.364 cw(c6.364,6.364)

## Silkscreen, mask and mechanical layers (free items; w line width, h text height)
Top Overlay:
  drawing of 3 lines, arcs and shapes, not listed
  text "BTN 1" at 13.306,63.677 h1.5 r270
  text "BTN 2" at 13.294,47.769 h1.5 r270
  text "BTN 3" at 13.306,31.773 h1.5 r270
  text "BTN 5" at 59.734,13.317 h1.5
  text "BTN 6" at 82.742,13.306 h1.5
  text "BTN 4" at 36.723,13.294 h1.5
  text "Hydronautics" at 8.435,13.267 h1
  text "SCREEN_SAUVC_26" at 11.169,5.083 h1
  text "Version 1.0" at 12.918,3.25 h1
  text "Developed by Soloviev M." at 3.92,1.417 h1
Bottom Overlay:
  lines w0.15: 32.5,14.681 32.5,10 41.74,10 ; 41.5,11.7 42.5,11.7 42.5,12.5 ; 43.34,10 44.66,10 ; 45.5,12.5 45.5,11.7 46.5,11.7 ; 46.26,10 47.9,10 47.9,14.681 ; 49,14.681 49,9.9 50.51,9.9 ; 51.49,9.9 55.748,9.9 ; 57.252,9.9 58.998,9.9 ; 60,10.378 60,14.681
  text "OUT" at 31.404,11.64 h1 r270
  text "RS485 P" at 40.704,11.567 h1 r270
  text "RS485 N" at 46.704,11.405 h1 r270
  text "DIO" at 36.204,10.803 h1 r270
  text "SCL" at 52.704,10.8 h1 r270
  text "CLK" at 39.204,10.766 h1 r270
  text "SDA" at 49.704,10.711 h1 r270
  text "3.3 v" at 55.704,10.593 h1 r270
  text "GND" at 58.704,10.601 h1 r270
  text "3.3 v" at 33.204,10.521 h1 r270
  text "SCREEN" at 60.649,10.1 h1.5 r270
  text "VIN" at 80.454,5.086 h1 r270
  text "GND" at 83.454,4.851 h1 r270
  text "9 - 32 V" at 81.954,4.286 h1 r270
Mechanical 3:
  lines w0.013: 0.006,3.006 ccw(c3.006,3.006) 3.006,0.006 85.506,0.006 ccw(c85.506,3.006) 88.506,3.006 88.506,12.006 ccw(c85.506,12.006) 85.506,15.006 20.506,15.006 cw(c20.506,20.506) 15.006,20.506 15.006,63.506 ccw(c12.006,63.506) 12.006,66.506 3.006,66.506 ccw(c3.006,63.506) 0.006,63.506 0.006,3.006 ; 6.364,4.864 ccw(c6.364,6.364) 6.364,7.864 ccw(c6.364,6.364) 6.364,4.864
Mechanical 7 (Mech17):
  lines w0.254: 0,18 18,0